# EAGLE board TeamD_PCBoard (EAGLE 8.3.2)
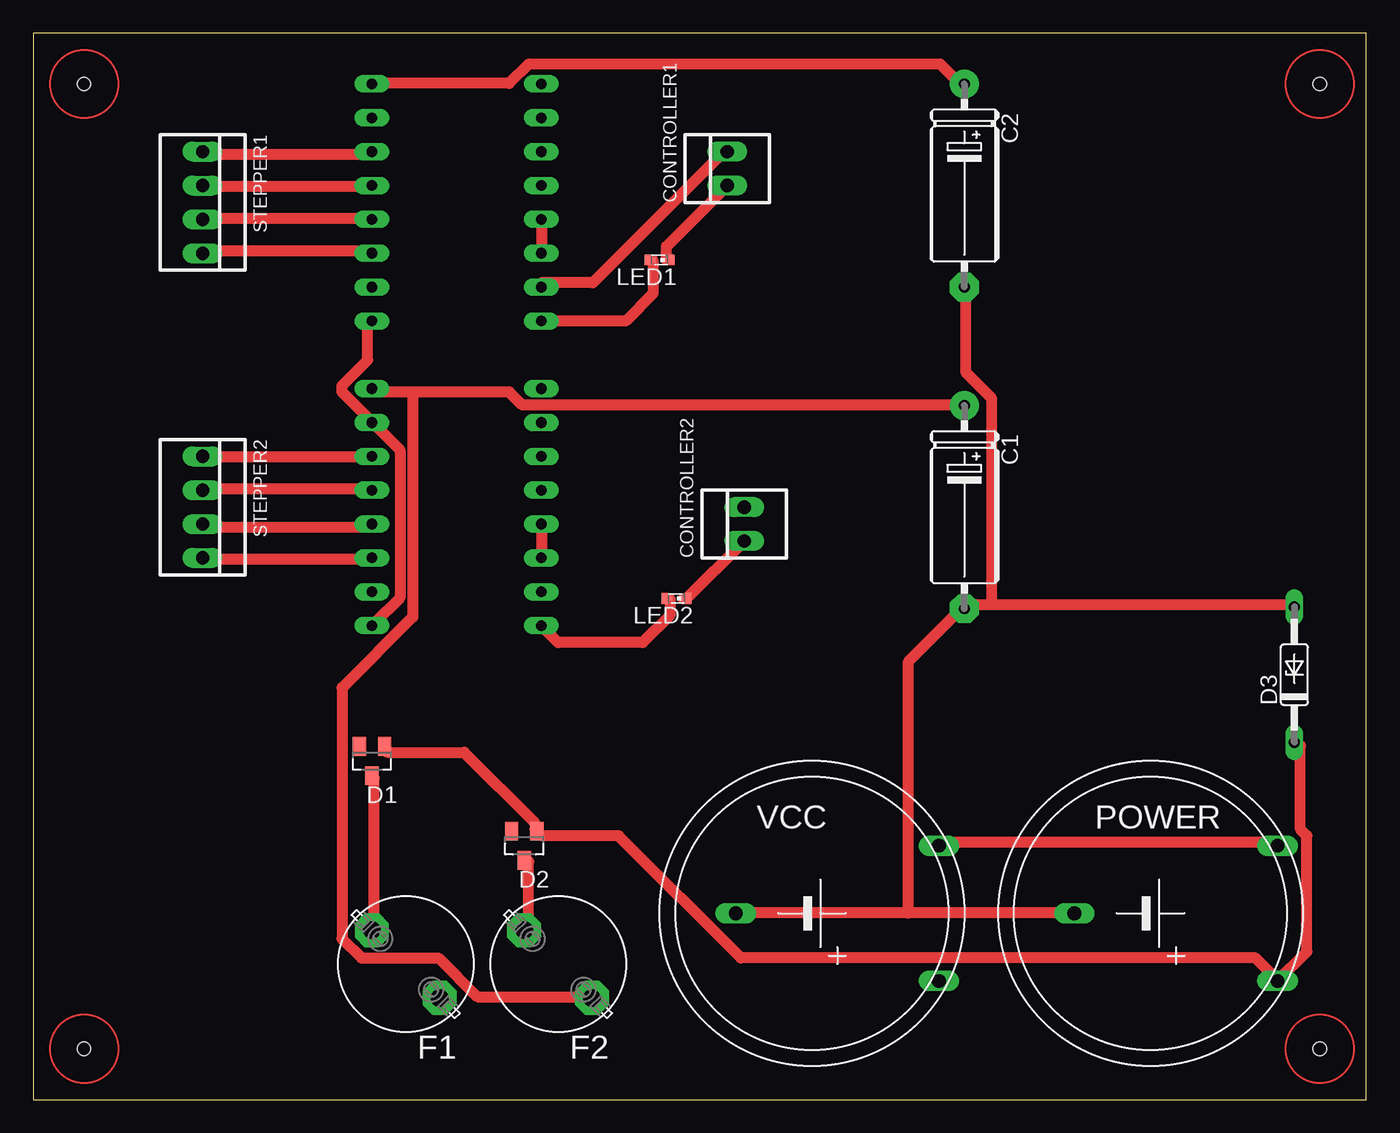
[diagram p0: board, top side]
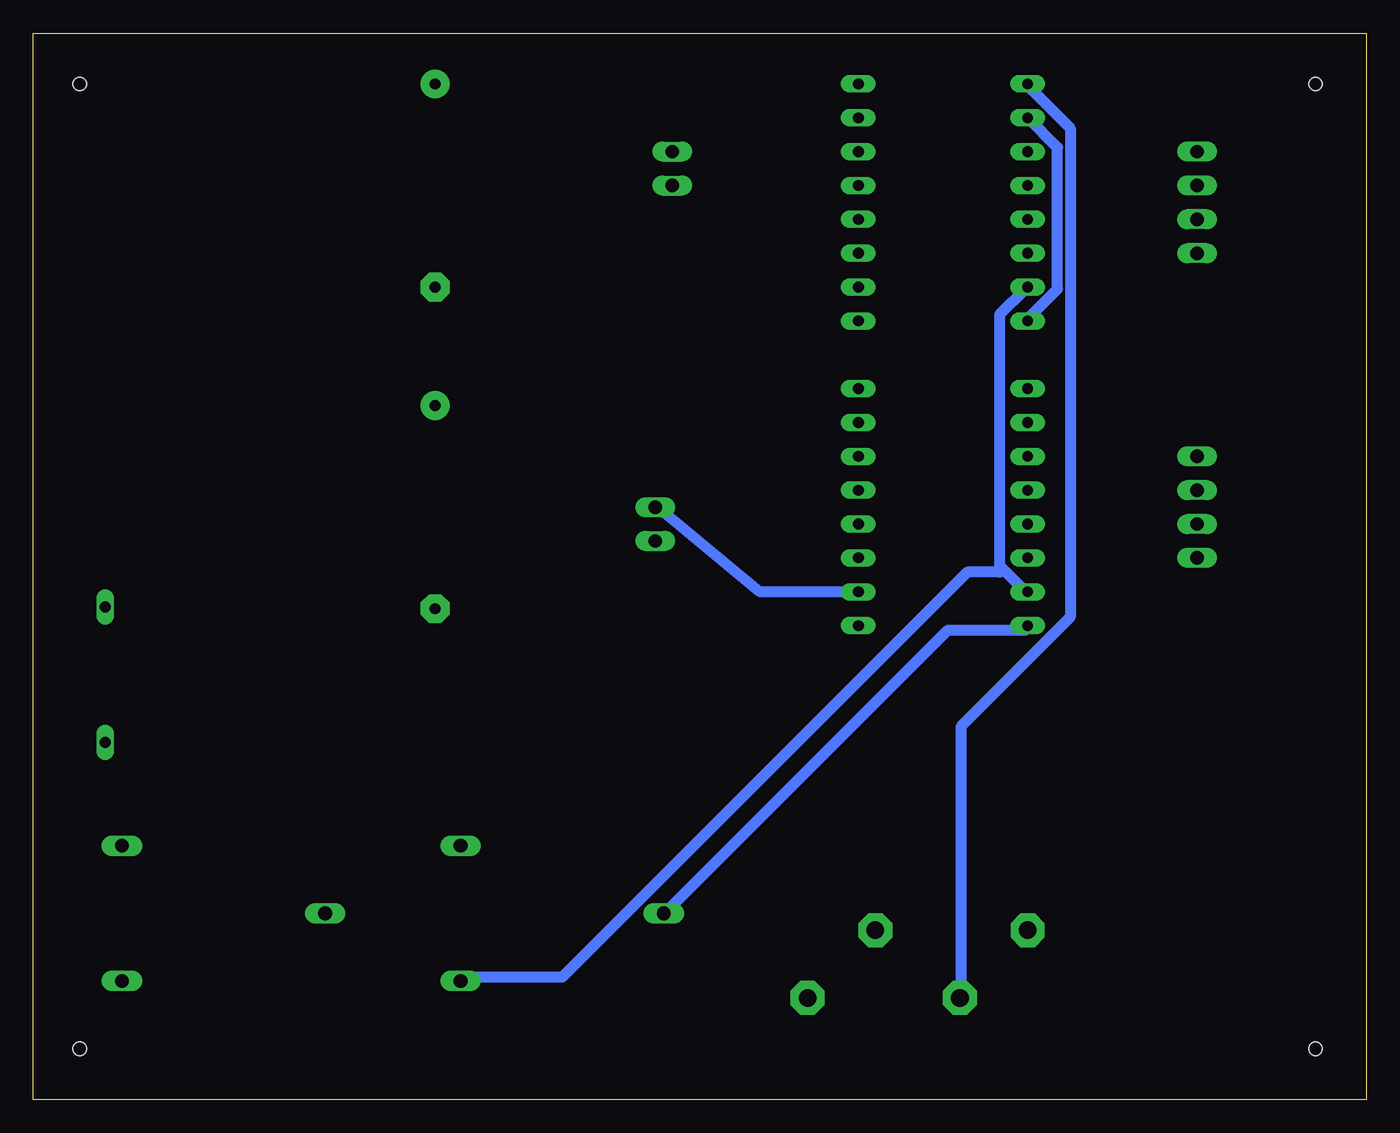
[diagram p1: board, bottom side, seen from below]

Size 100 x 80 mm. Coordinates in mm from the lower left corner, seen from the top.
Outline: 0,0 100,0 100,80 0,80 0,0
Copper layers (1*16): Top 0.035mm / dielectric 1.5mm / Bottom 0.035mm
Design rules "default *": minimum track width 32mil, minimum drill 0.35mm, track to track 6mil, track to pad 6mil, pad to pad 6mil, via to via 6mil, smd to smd 6mil, copper to edge 40mil, drill to drill 6mil, minimum pad ring 10mil, minimum via ring 8mil, stop-mask expansion 4mil, vias tented up to drill 0mil, thermal gap 10mil
Holes 1 mm at 3.81,76.2 96.52,76.2 3.81,3.81 96.52,3.81

## Footprints (pad centres in the part's own frame; a part is rotated, then mirrored left to right if it is on the bottom)
E15-5 = drill 0.813 pad 2.159: + -7.62,0 | drill 0.813 pad 2.159 octagon: - 7.62,0
22-23-2021 = drill 1 long: 1 -1.27,0; 2 1.27,0
SOT23 = smd 1 x 1.4: 1 -0.95,-1.1; 2 0.95,-1.1; 3 0,1.1
DO35Z10 = drill 0.813 long: A 5.08,0; C -5.08,0
19559 = drill 1.321 pad 2.54 octagon: 1 -2.54,2.54; 2 2.54,-2.54
SMARTLED-TTW = smd 0.8 x 0.5: A 0,-0.875; C 0,0.875 | smd 0.35 x 0.35: A@1 0,-0.5; C@1 0,0.5
BATTERY = drill 1.016 long: + 9.525,-5.08; +@1 9.525,5.08; - -5.715,0
22-23-2041 = drill 1 long: 1 -3.81,0; 2 -1.27,0; 3 1.27,0; 4 3.81,0
STEP-STICK = drill 0.8 long: 1A -8.89,-7.62; 1B -8.89,-5.08; 2A -8.89,-2.54; 2B -8.89,0; DIR 3.81,-12.7; EN 3.81,5.08; GND -8.89,-12.7; GNDM -8.89,2.54; MS1 3.81,2.54; MS2 3.81,0; MS3 3.81,-2.54; RST 3.81,-5.08; SLP 3.81,-7.62; SPT 3.81,-10.16; VCC -8.89,-10.16; VMOT -8.89,5.08

## Placement (x,y rotation side)
C1  100uF  [E15-5]  69.85,44.45 270 top
C2  100uF  [E15-5]  69.85,68.58 270 top
CONTROLLER1  22-23-2021  [22-23-2021]  52.07,69.85 90 top
CONTROLLER2  22-23-2021  [22-23-2021]  53.34,43.18 90 top
D1  BAS40  [SOT23]  25.4,25.4 180 top
D2  BAS40  [SOT23]  36.83,19.05 180 top
D3  ZPD  [DO35Z10]  94.61,31.88 90 top
F1  1.5A  [19559]  27.94,10.16 180 top
F2  1.5A  [19559]  39.37,10.16 180 top
LED1  [SMARTLED-TTW]  46.99,62.99 90 top
LED2  [SMARTLED-TTW]  48.26,37.59 90 top
POWER  12V  [BATTERY]  83.82,13.97 0 top
STEPPER1  22-23-2041  [22-23-2041]  12.7,67.31 270 top
STEPPER2  22-23-2041  [22-23-2041]  12.7,44.45 270 top
U$1  STEP-STICK  [STEP-STICK]  34.29,71.12 0 top
U$2  STEP-STICK  [STEP-STICK]  34.29,48.26 0 top
VCC  5V  [BATTERY]  58.42,13.97 0 top

## Library data of the parts
C1 C2 = rcl
CONTROLLER1 CONTROLLER2 = con-molex; MF: MOLEX; MPN: 22-23-2021; OC_FARNELL: 1462926; OC_NEWARK: 25C3832
D1-D3 = diode
F1 F2 = fuse; MPN: 55900000001; OC_FARNELL: 9516360; OC_NEWARK: 02P0286
LED1 LED2 = led
POWER VCC = special
STEPPER1 STEPPER2 = con-molex; MF: MOLEX; MPN: 22-23-2041; OC_FARNELL: 1462920; OC_NEWARK: 38C0355
U$1 U$2 = Arduino-clone

## Nets
+: POWER.+@1 VCC.+@1
N$1: CONTROLLER1.2 U$1.SPT
N$3: CONTROLLER2.2 U$2.SPT
N$4: CONTROLLER2.1 LED2.A@1
N$5: U$1.RST U$1.SLP
N$6: U$2.RST U$2.SLP
N$7: STEPPER2.1 U$2.2B
N$8: STEPPER2.2 U$2.2A
N$9: STEPPER2.3 U$2.1B
N$10: STEPPER2.4 U$2.1A
N$11: STEPPER1.1 U$1.2B
N$12: STEPPER1.2 U$1.2A
N$13: STEPPER1.3 U$1.1B
N$14: STEPPER1.4 U$1.1A
N$15: D1.3 F1.2
N$17: LED1.C@1 U$1.DIR
N$18: LED2.C@1 U$2.DIR
N$19: C2.+ F1.1 U$1.VMOT
N$20: C1.+ F2.1 U$2.VMOT
N$21: U$1.VCC U$2.VCC VCC.+
N$22: D2.3 F2.2
N$25: D1.1 D2.1 D3.C POWER.+
N$27: C1.- C2.- D3.A POWER.- U$1.GND U$1.GNDM U$2.GND U$2.GNDM VCC.-
S$1: LED1.A@1

## Tracks (layer width: path | path; a pad name or v marks a point on that pad's centre or on a via)
+
  Top 0.813: VCC.+@1 68.05,19.3 93.14,19.3 POWER.+@1
N$1
  Top 0.813: U$1.SPT 38.12,61.29 41.99,61.29 51.64,70.94 CONTROLLER1.2
N$3
  Bottom 0.813: U$2.SPT 38.12,38.12 45.54,38.12 53.09,44.4 CONTROLLER2.2
N$4
  Top 0.813: LED2.A@1 49.02,37.59 CONTROLLER2.1
N$5
  Top 0.813: U$1.SLP 38.12,63.7 38.12,65.63 U$1.RST
N$6
  Top 0.813: U$2.SLP 38.12,41.02 38.12,42.95 U$2.RST
N$7
  Top 0.813: STEPPER2.1 U$2.2B
N$8
  Top 0.813: U$2.2A 25.09,45.85 13.03,45.85 STEPPER2.2
N$9
  Top 0.813: U$2.1B 25.09,42.95 13.03,42.95 STEPPER2.3
N$10
  Top 0.813: U$2.1A 25.09,40.54 13.03,40.54 STEPPER2.4
N$11
  Top 0.813: U$1.2B 25.09,70.94 13.03,70.94 STEPPER1.1
N$12
  Top 0.813: U$1.2A 25.09,68.53 13.03,68.53 STEPPER1.2
N$13
  Top 0.813: U$1.1B 25.09,66.12 13.03,66.12 STEPPER1.3
N$14
  Top 0.813: U$1.1A 25.09,63.7 13.03,63.7 STEPPER1.4
N$15
  Top 0.813: D1.3 25.58,24.13 25.58,13.03 F1.2
N$17
  Top 0.813: LED1.C@1 46.49,60.46 44.45,58.42 U$1.DIR
N$18
  Top 0.813: LED2.C@1 47.76,36.33 45.72,34.29 39.37,34.29 U$2.DIR
N$19
  Top 0.813: U$1.VMOT 25.58,76.25 35.71,76.25 37.16,77.7 68.05,77.7 69.49,76.25 C2.+
  Bottom 0.813: F1.1 30.4,7.72 30.4,27.99 22.2,36.2 22.2,72.87 25.09,75.77 U$1.VMOT
N$20
  Top 0.813: 28.47,53.09 35.71,53.09 36.68,52.12 69.49,52.12 C1.+ | 28.47,53.09 25.58,53.09 U$2.VMOT | 28.47,53.09 28.47,36.2 23.16,30.89 23.16,12.06 24.61,10.62 30.4,10.62 33.3,7.72 41.5,7.72 F2.1
N$21
  Bottom 0.813: 27.27,39.81 27.51,40.06 27.51,58.88 25.58,60.81 U$1.VCC | 27.27,39.81 25.58,38.12 U$2.VCC | VCC.+ 67.56,9.17 60.33,9.17 29.92,39.57 27.51,39.57 27.27,39.81
N$22
  Top 0.813: D2.3 37.16,17.86 37.16,13.03 F2.2
N$25
  Top 0.813: D1.1 26.54,26.06 32.33,26.06 37.64,20.75 37.64,20.27 D2.1 38.12,19.79 43.92,19.79 53.09,10.62 91.69,10.62 93.14,9.17 POWER.+ 95.56,11.1 95.56,19.79 95.07,20.27 95.07,26.54 D3.C
N$27
  Top 0.813: U$2.GND 25.58,35.71 27.51,37.64 27.51,48.74 25.58,50.67 U$2.GNDM 25.09,51.16 23.16,53.09 23.16,53.57 25.09,55.5 25.09,58.4 U$1.GND | 65.63,13.99 77.7,13.99 POWER.- | 65.63,13.99 53.09,13.99 VCC.- | 71.91,37.16 69.98,37.16 C1.- 69.49,36.68 65.63,32.82 65.63,13.99 | 71.91,37.16 94.59,37.16 D3.A | 71.91,37.16 71.91,52.6 69.98,54.53 69.98,60.81 C2.-
  Bottom 0.813: U$1.GNDM 23.16,71.42 23.16,60.81 25.09,58.88 U$1.GND | U$2.GND 25.58,35.23 31.37,35.23 52.6,13.99 VCC.-
S$1
  Top 0.813: LED1.A@1 47.49,64 52.07,68.58
(copper drawn outside any net)
  shapes: Top circle x4